# EAGLE board Legacy (EAGLE 9.1.3)
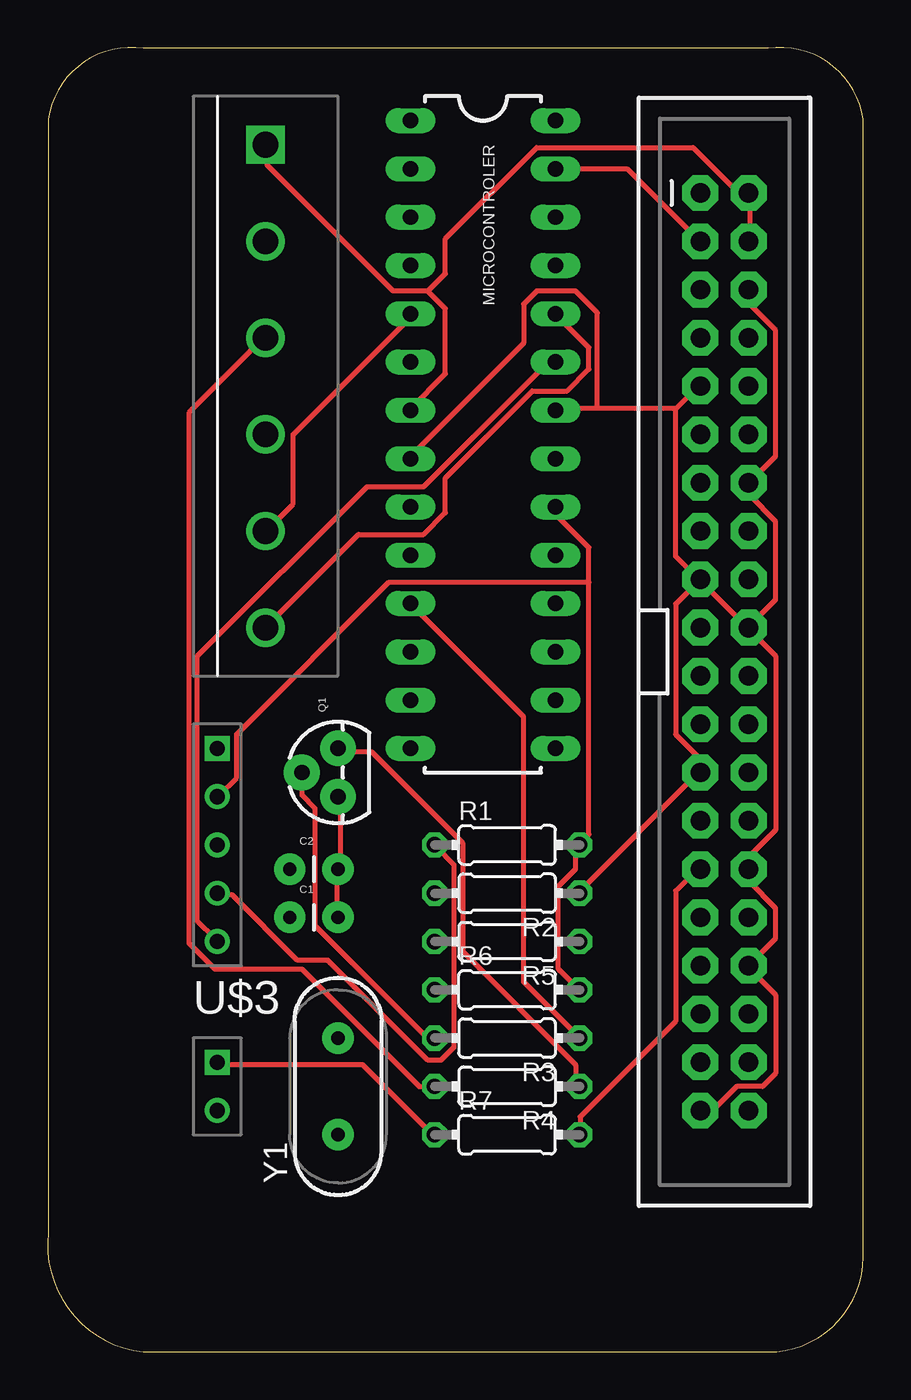
[diagram p0: board, top side]
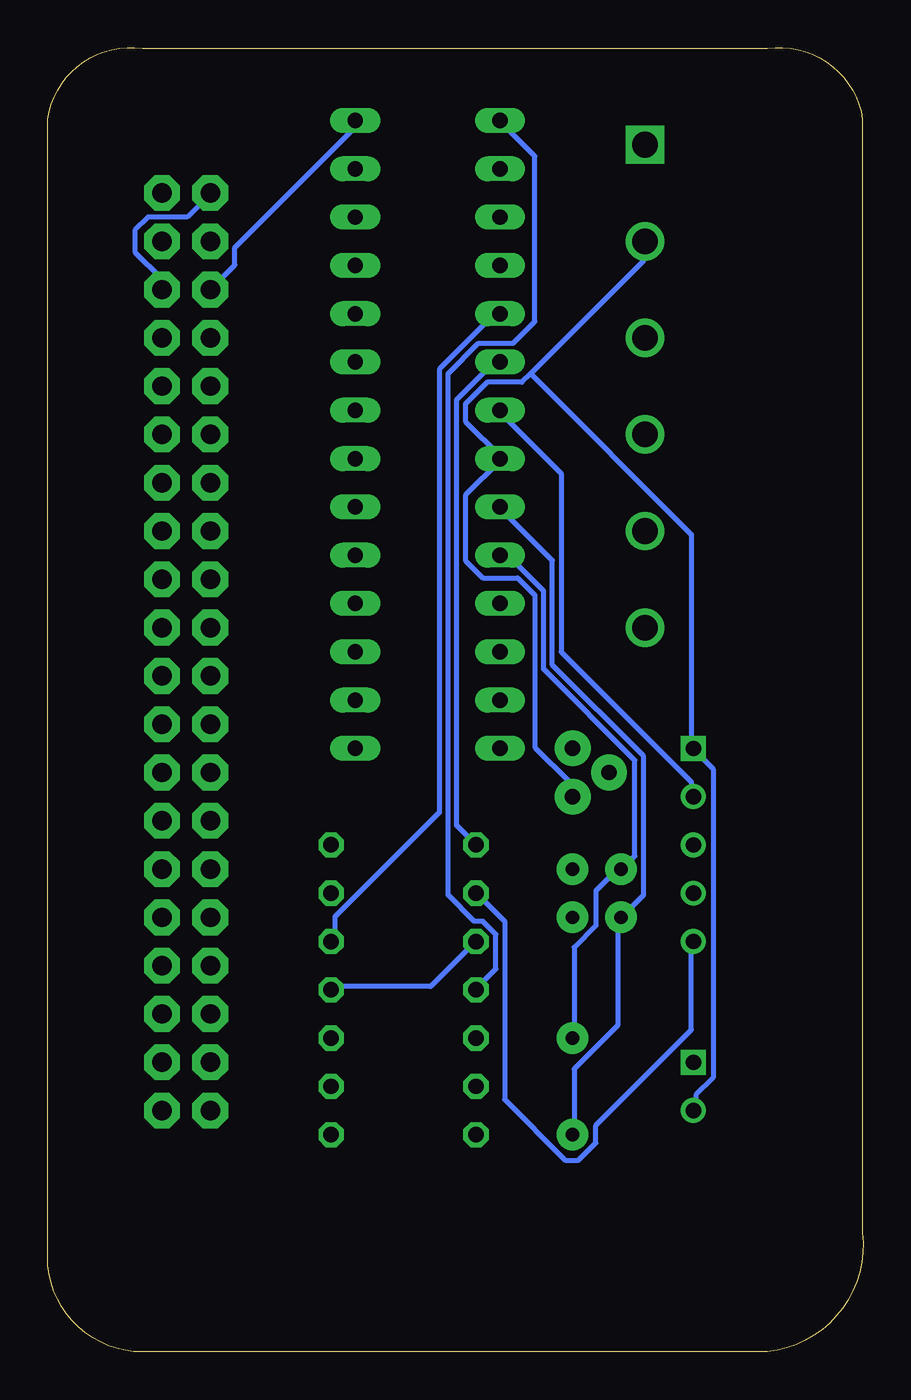
[diagram p1: board, bottom side, seen from below]

Size 42.88 x 68.61 mm. Coordinates in mm from the lower left corner, seen from the top.
Outline: 37.88,68.57 5.03,68.57 arc90 0.03,64.84 0.03,6.27 arc90 5.03,0 37.88,0 arc90 42.88,5 42.88,64.84 arc90 37.88,68.57
Copper layers (1*16): Top 0.035mm / dielectric 1.5mm / Bottom 0.035mm
Design rules "default": minimum track width 10mil, minimum drill 24mil, track to track 8mil, track to pad 8mil, pad to pad 8mil, via to via 8mil, smd to smd 8mil, copper to edge 40mil, drill to drill 8mil, minimum pad ring 10mil, minimum via ring 8mil, stop-mask expansion 4mil, vias tented up to drill 0mil, thermal gap 10mil

## Footprints (pad centres in the part's own frame; a part is rotated, then mirrored left to right if it is on the bottom)
CAP-PTH-SMALL = drill 0.7 pad 1.651: 1 0,0; 2 2.54,0
ENV_OUT = drill 0.8 square: 1 0,5.08 | drill 0.8: 2 0,2.54; 3 0,0; 4 0,-2.54; 5 0,-5.08
DIL28-3 = drill 0.813 long: 1 -16.51,-3.81; 2 -13.97,-3.81; 3 -11.43,-3.81; 4 -8.89,-3.81; 5 -6.35,-3.81; 6 -3.81,-3.81; 7 -1.27,-3.81; 8 1.27,-3.81; 9 3.81,-3.81; 10 6.35,-3.81; 11 8.89,-3.81; 12 11.43,-3.81; 13 13.97,-3.81; 14 16.51,-3.81; 15 16.51,3.81; 16 13.97,3.81; 17 11.43,3.81; 18 8.89,3.81; 19 6.35,3.81; 20 3.81,3.81; 21 1.27,3.81; 22 -1.27,3.81; 23 -3.81,3.81; 24 -6.35,3.81; 25 -8.89,3.81; 26 -11.43,3.81; 27 -13.97,3.81; 28 -16.51,3.81
TO-92 = drill 0.813 pad 1.88: 1 -1.27,0; 2 0,1.905; 3 1.27,0
0204/7 = drill 0.813 octagon: 1 -3.81,0; 2 3.81,0
2X20-SHROUDED = drill 1.016 pad 1.88 octagon: 1 -1.27,24.13; 2 1.27,24.13; 3 -1.27,21.59; 4 1.27,21.59; 5 -1.27,19.05; 6 1.27,19.05; 7 -1.27,16.51; 8 1.27,16.51; 9 -1.27,13.97; 10 1.27,13.97; 11 -1.27,11.43; 12 1.27,11.43; 13 -1.27,8.89; 14 1.27,8.89; 15 -1.27,6.35; 16 1.27,6.35; 17 -1.27,3.81; 18 1.27,3.81; 19 -1.27,1.27; 20 1.27,1.27; 21 -1.27,-1.27; 22 1.27,-1.27; 23 -1.27,-3.81; 24 1.27,-3.81; 25 -1.27,-6.35; 26 1.27,-6.35; 27 -1.27,-8.89; 28 1.27,-8.89; 29 -1.27,-11.43; 30 1.27,-11.43; 31 -1.27,-13.97; 32 1.27,-13.97; 33 -1.27,-16.51; 34 1.27,-16.51; 35 -1.27,-19.05; 36 1.27,-19.05; 37 -1.27,-21.59; 38 1.27,-21.59; 39 -1.27,-24.13; 40 1.27,-24.13
SOIL_OUT = drill 1.346 square: 1 0,12.7 | drill 1.346: 2 0,7.62; 3 0,2.54; 4 0,-2.54; 5 0,-7.62; 6 0,-12.7
LED = drill 0.8 square: 1 0,1.27 | drill 0.8: 2 0,-1.27
HC49US = drill 0.7 pad 1.651: 1 -2.54,0; 2 2.54,0

## Placement (x,y rotation side)
C1  22pF  [CAP-PTH-SMALL]  12.73,22.86 0 top
C2  22pF  [CAP-PTH-SMALL]  12.73,25.4 0 top
ENVIRONMENTAL_SENSOR  ENV_OUT  [ENV_OUT]  8.92,26.67 0 top
MICROCONTROLER  ATMEGA328P_PDIP  [DIL28-3]  22.89,48.26 270 top
Q1  [TO-92]  15.27,30.48 90 top
R1  10K  [0204/7]  24.16,26.67 0 top
R2  10K  [0204/7]  24.16,24.13 180 top
R3  1K  [0204/7]  24.16,16.51 180 top
R4  100  [0204/7]  24.16,13.97 180 top
R5  4.7K  [0204/7]  24.16,21.59 180 top
R6  4.7K  [0204/7]  24.16,19.05 0 top
R7  68  [0204/7]  24.16,11.43 0 top
SINGLE_BOARD_COMPUTER  RASPBERRYPI-40-PIN-GPIO  [2X20-SHROUDED]  35.59,36.83 0 top
SOIL_SENSOR  SOIL_OUT  [SOIL_OUT]  11.46,50.8 0 top
U$3  LED  [LED]  8.92,13.97 0 top
Y1  16MHz  [HC49US]  15.27,13.97 90 top

## Library data of the parts
C1 C2 = SparkFun-Capacitors
ENVIRONMENTAL_SENSOR SOIL_SENSOR U$3 = 000_CropQuant
MICROCONTROLER = SparkFun-DigitalIC
Q1 = SparkFun-DiscreteSemi; PROD_ID: TRANS-09536
R1-R7 = resistor
SINGLE_BOARD_COMPUTER = 001_SparkFun-Boards
Y1 = SparkFun-FreqCtrl

## Nets
3.3V: C1.2 C2.2 ENVIRONMENTAL_SENSOR.1 MICROCONTROLER.8 MICROCONTROLER.22 Q1.1 R2.1 SINGLE_BOARD_COMPUTER.1 SINGLE_BOARD_COMPUTER.6 SINGLE_BOARD_COMPUTER.9 SINGLE_BOARD_COMPUTER.14 SINGLE_BOARD_COMPUTER.17 SINGLE_BOARD_COMPUTER.20 SINGLE_BOARD_COMPUTER.25 SINGLE_BOARD_COMPUTER.30 SINGLE_BOARD_COMPUTER.34 SINGLE_BOARD_COMPUTER.39 SOIL_SENSOR.2 U$3.2
5V: ENVIRONMENTAL_SENSOR.2 MICROCONTROLER.7 MICROCONTROLER.20 R1.2 R5.2 R6.2 SINGLE_BOARD_COMPUTER.2 SINGLE_BOARD_COMPUTER.4 SOIL_SENSOR.1
N$1: C1.1 MICROCONTROLER.9 Y1.1
N$2: C2.1 MICROCONTROLER.10 Y1.2
N$3: Q1.3 R4.1
N$4: ENVIRONMENTAL_SENSOR.5 MICROCONTROLER.23 R2.2
N$5: MICROCONTROLER.27 SINGLE_BOARD_COMPUTER.3
N$6: MICROCONTROLER.5 R5.1 SOIL_SENSOR.5
N$7: ENVIRONMENTAL_SENSOR.4 MICROCONTROLER.6 R1.1
N$8: MICROCONTROLER.11 R3.1
N$9: Q1.2 R3.2
N$10: R4.2 SOIL_SENSOR.3
N$11: MICROCONTROLER.24 SOIL_SENSOR.6
N$12: MICROCONTROLER.28 SINGLE_BOARD_COMPUTER.5
N$15: MICROCONTROLER.1 R6.1
N$16: R7.1 U$3.1
N$17: R7.2 SINGLE_BOARD_COMPUTER.29

## Tracks (layer width: path | path; a pad name or v marks a point on that pad's centre or on a via)
3.3V
  Top 0.254: C1.2 15.2,22.88 15.2,25.4 C2.2 15.43,25.4 15.43,29.06 Q1.1 | SINGLE_BOARD_COMPUTER.39 34.4,12.83 35.09,12.83 36.23,13.97 37.6,13.97 38.29,14.66 38.29,18.77 36.92,20.14 SINGLE_BOARD_COMPUTER.34 38.29,21.74 38.29,23.34 36.92,24.71 36.92,25.4 | R2.1 28,24.26 34.17,30.43 SINGLE_BOARD_COMPUTER.25 34.17,30.66 34.17,31.34 33.03,32.49 33.03,39.34 SINGLE_BOARD_COMPUTER.17 | 33.03,49.63 28.91,49.63 | 28.91,49.63 26.86,49.63 MICROCONTROLER.22 | 33.03,49.63 34.17,50.77 SINGLE_BOARD_COMPUTER.9 | SINGLE_BOARD_COMPUTER.17 34.4,40.49 36.69,38.2 SINGLE_BOARD_COMPUTER.20 | SINGLE_BOARD_COMPUTER.20 36.92,38.2 38.29,39.57 38.29,43.69 36.92,45.06 36.92,45.52 SINGLE_BOARD_COMPUTER.14 36.92,45.74 38.29,47.12 38.29,53.75 36.92,55.12 36.92,55.8 SINGLE_BOARD_COMPUTER.6 | 33.03,49.63 33.03,41.86 34.17,40.72 SINGLE_BOARD_COMPUTER.17 | 36.92,25.4 36.92,26.09 38.29,27.46 38.29,36.6 36.92,37.97 SINGLE_BOARD_COMPUTER.20 | 36.92,25.4 SINGLE_BOARD_COMPUTER.30 | 28.91,49.63 28.91,54.66 27.77,55.8 25.71,55.8 25.03,55.12 25.03,53.06 19.08,47.12 MICROCONTROLER.8
  Bottom 0.254: U$3.2 8.8,12.83 8.8,13.51 7.88,14.43 7.88,30.66 8.8,31.57 ENVIRONMENTAL_SENSOR.1 9.03,31.8 9.03,43 17.48,51.46 | 17.48,51.46 11.54,57.4 11.54,58.32 SOIL_SENSOR.2 | 17.48,51.46 17.94,51 19.77,51 20.91,49.86 20.91,48.95 19.08,47.12 MICROCONTROLER.8 19.08,46.89 20.91,45.06 20.91,41.63 20,40.72 18.17,40.72 17.26,39.8 17.26,31.8 15.43,29.97 15.43,29.29 Q1.1 | SINGLE_BOARD_COMPUTER.6 36.92,56.03 36.92,56.49 38.29,57.86 38.29,59 37.6,59.69 35.54,59.69 34.4,60.83 SINGLE_BOARD_COMPUTER.1
5V
  Top 0.254: R6.2 27.77,19.23 26.86,20.14 26.86,24.49 27.77,25.4 27.77,26.54 R1.2 28,26.77 28.46,27.23 28.46,40.49 | 28.46,40.49 28.46,42.32 26.86,43.92 26.86,44.37 MICROCONTROLER.20 | SINGLE_BOARD_COMPUTER.4 36.92,58.55 36.92,60.83 SINGLE_BOARD_COMPUTER.2 36.69,61.06 36.23,61.06 33.94,63.35 25.71,63.35 20.91,58.55 20.91,56.72 20,55.8 | 20,55.8 18.17,55.8 11.54,62.43 11.54,63.35 SOIL_SENSOR.1 | 20,55.8 20.91,54.89 20.91,51.46 19.08,49.63 MICROCONTROLER.7 | 28.46,40.49 17.94,40.49 9.94,32.49 9.94,30.2 9.03,29.29 ENVIRONMENTAL_SENSOR.2
  Bottom 0.254: R6.2 27.77,19.23 22.74,19.23 20.46,21.51 R5.2 | ENVIRONMENTAL_SENSOR.2 9.03,29.29 9.03,29.97 15.88,36.83 15.88,46.2 19.08,49.4 MICROCONTROLER.7
N$1
  Bottom 0.254: MICROCONTROLER.9 19.08,44.37 16.34,41.63 16.34,36.14 11.54,31.34 11.54,24.03 12.68,22.88 C1.1 12.91,22.66 12.91,17.17 15.2,14.88 15.2,11.45 Y1.1
N$2
  Bottom 0.254: MICROCONTROLER.10 19.08,41.86 18.63,41.86 16.8,40.03 16.8,35.92 12,31.12 12,26.09 12.68,25.4 C2.1 12.91,25.4 14.06,24.26 14.06,22.43 15.2,21.29 15.2,16.71 Y1.2
N$3
  Top 0.254: R4.1 27.77,13.97 27.77,15.11 21.83,21.06 21.83,26.77 17.03,31.57 15.43,31.57 Q1.3
N$4
  Top 0.254: MICROCONTROLER.23 26.63,51.92 26.17,51.92 19.77,45.52 16.8,45.52 7.88,36.6 7.88,22.66 8.8,21.74 ENVIRONMENTAL_SENSOR.5
  Bottom 0.254: ENVIRONMENTAL_SENSOR.5 9.03,21.51 9.03,16.94 14.06,11.91 14.06,11 14.97,10.08 15.66,10.08 18.86,13.28 18.86,22.66 20.23,24.03 R2.2
N$5
  Top 0.254: MICROCONTROLER.27 26.86,62.2 30.51,62.2 34.17,58.55 SINGLE_BOARD_COMPUTER.3
N$6
  Top 0.254: MICROCONTROLER.5 19.08,54.43 12.91,48.26 12.91,44.6 11.54,43.23 SOIL_SENSOR.5
  Bottom 0.254: R5.1 27.77,21.74 27.77,22.88 22.28,28.37 22.28,51.69 19.54,54.43 19.08,54.43 MICROCONTROLER.5
N$7
  Top 0.254: ENVIRONMENTAL_SENSOR.4 9.03,24.03 9.71,24.03 13.14,20.6 14.74,20.6 20,15.34 20.68,15.34 21.37,16.03 21.37,25.63 20.46,26.54 R1.1
  Bottom 0.254: R1.1 21.37,27.69 21.37,50.09 19.54,51.92 19.08,51.92 MICROCONTROLER.6
N$8
  Top 0.254: R3.1 25.03,19.46 25.03,33.4 19.08,39.34 MICROCONTROLER.11
N$9
  Top 0.254: Q1.2 13.37,29.29 14.06,28.6 14.06,22.43 19.77,16.71 20.23,16.71 R3.2
N$10
  Top 0.254: R4.2 19.54,13.97 13.37,20.14 8.8,20.14 7.43,21.51 7.43,49.4 11.31,53.29 SOIL_SENSOR.3
N$11
  Top 0.254: MICROCONTROLER.24 26.86,54.43 28.46,52.83 28.46,51.69 27.31,50.55 25.49,50.55 20.91,45.97 20.91,44.14 19.77,43 16.34,43 11.54,38.2 SOIL_SENSOR.6
N$12
  Bottom 0.254: SINGLE_BOARD_COMPUTER.5 33.03,57.17 33.03,58.09 26.86,64.26 26.86,64.72 MICROCONTROLER.28
N$15
  Bottom 0.254: MICROCONTROLER.1 19.08,64.72 17.26,62.89 17.26,54.2 18.4,53.06 20.23,53.06 21.83,51.46 21.83,24.03 20.46,22.66 20,22.66 19.31,21.97 19.31,20.14 20.23,19.23 R6.1
N$16
  Top 0.254: U$3.1 9.03,15.11 16.57,15.11 20.23,11.45 R7.1
N$17
  Top 0.254: R7.2 28,11.45 28,12.37 33.03,17.4 33.03,24.26 34.17,25.4 SINGLE_BOARD_COMPUTER.29

## Text on the board
tDocu: ATMEGA328P | 10k | 10k | 4.7k | 4.7k | 1k | 100 | 16MHz | 68 | CropQuant | Sensor Module